# Altium PCB Voltage_Follower_PCB.PcbDoc
Units mil, origin at the board's own origin, x right, y up, seen from the top; angles counter-clockwise.
Board outline 2835 x 2210 mil, 2 copper layers (Top Layer, Bottom Layer); 24 components, 16 nets, 76 pads, 0 vias.
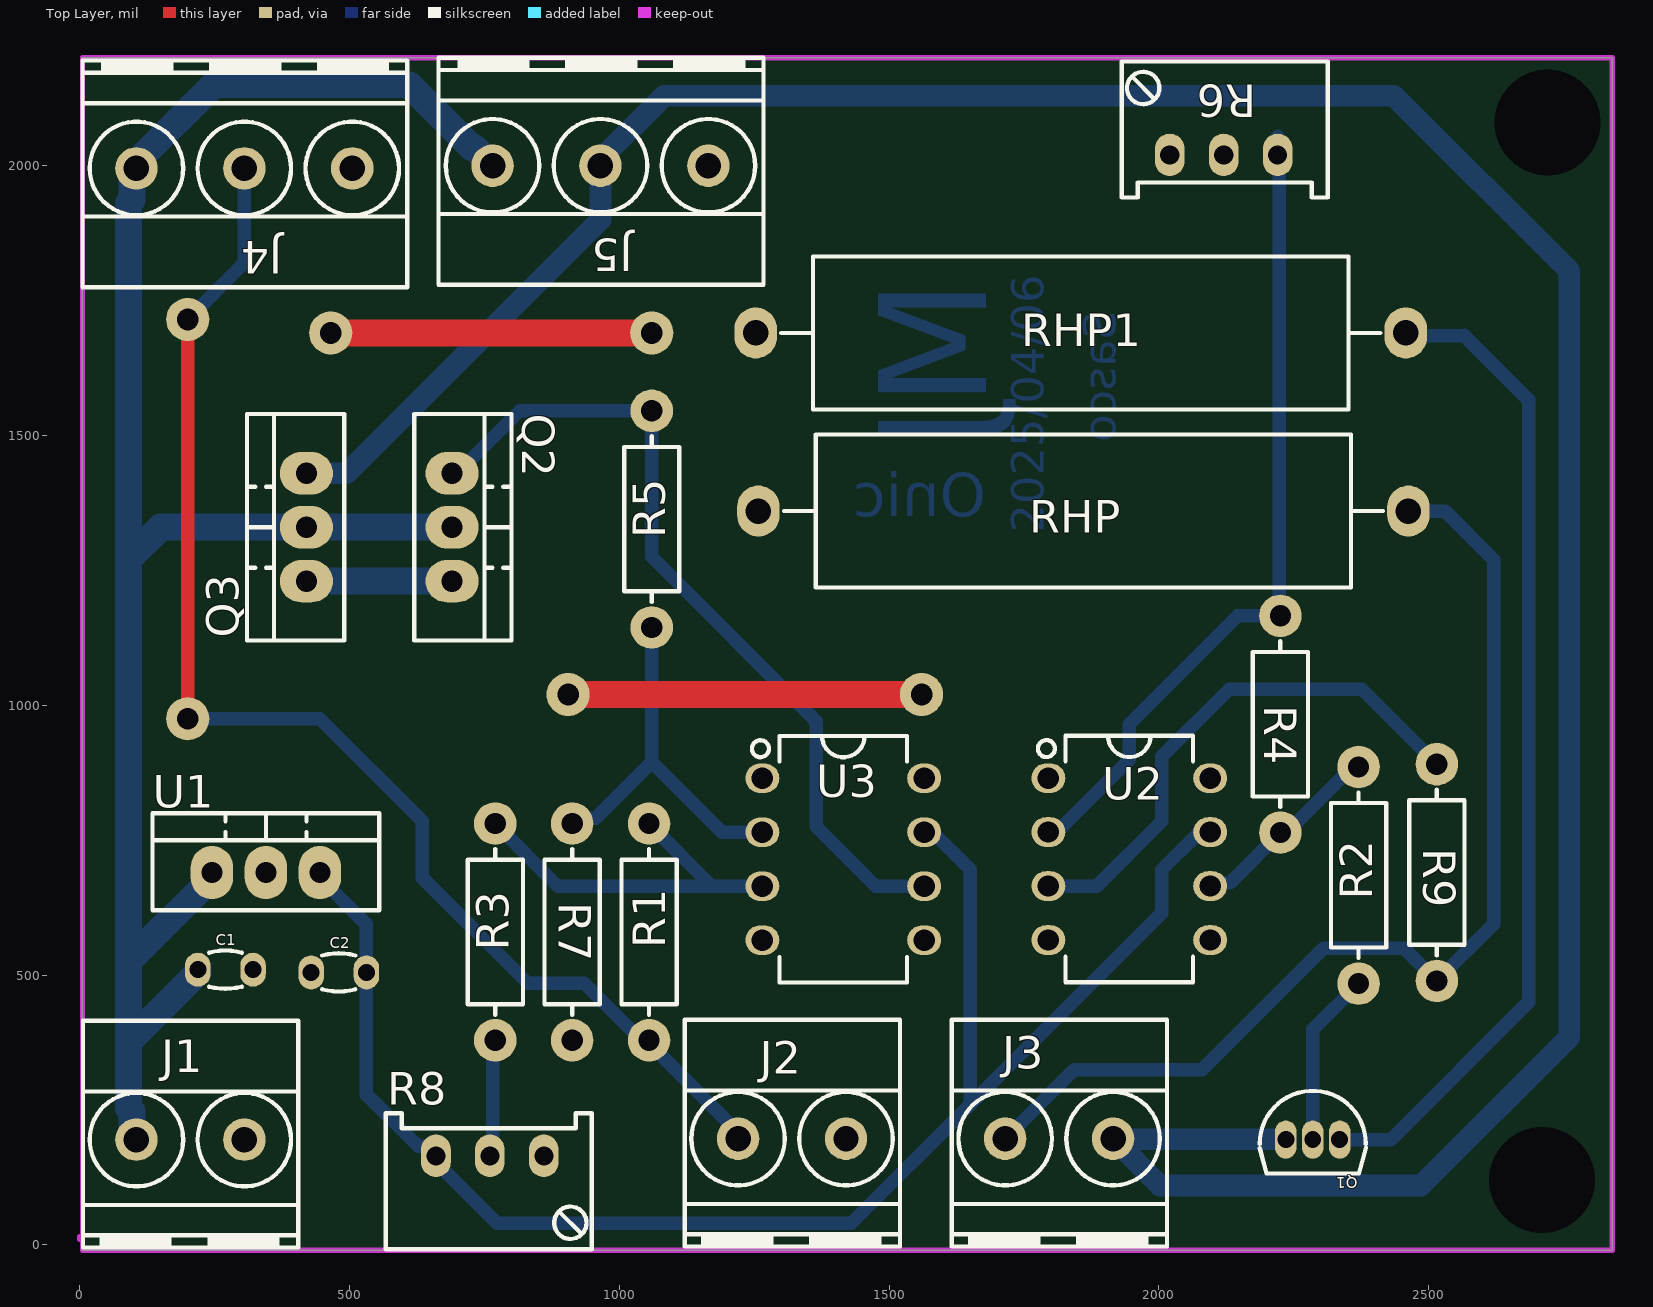
[diagram p0: Top Layer view]
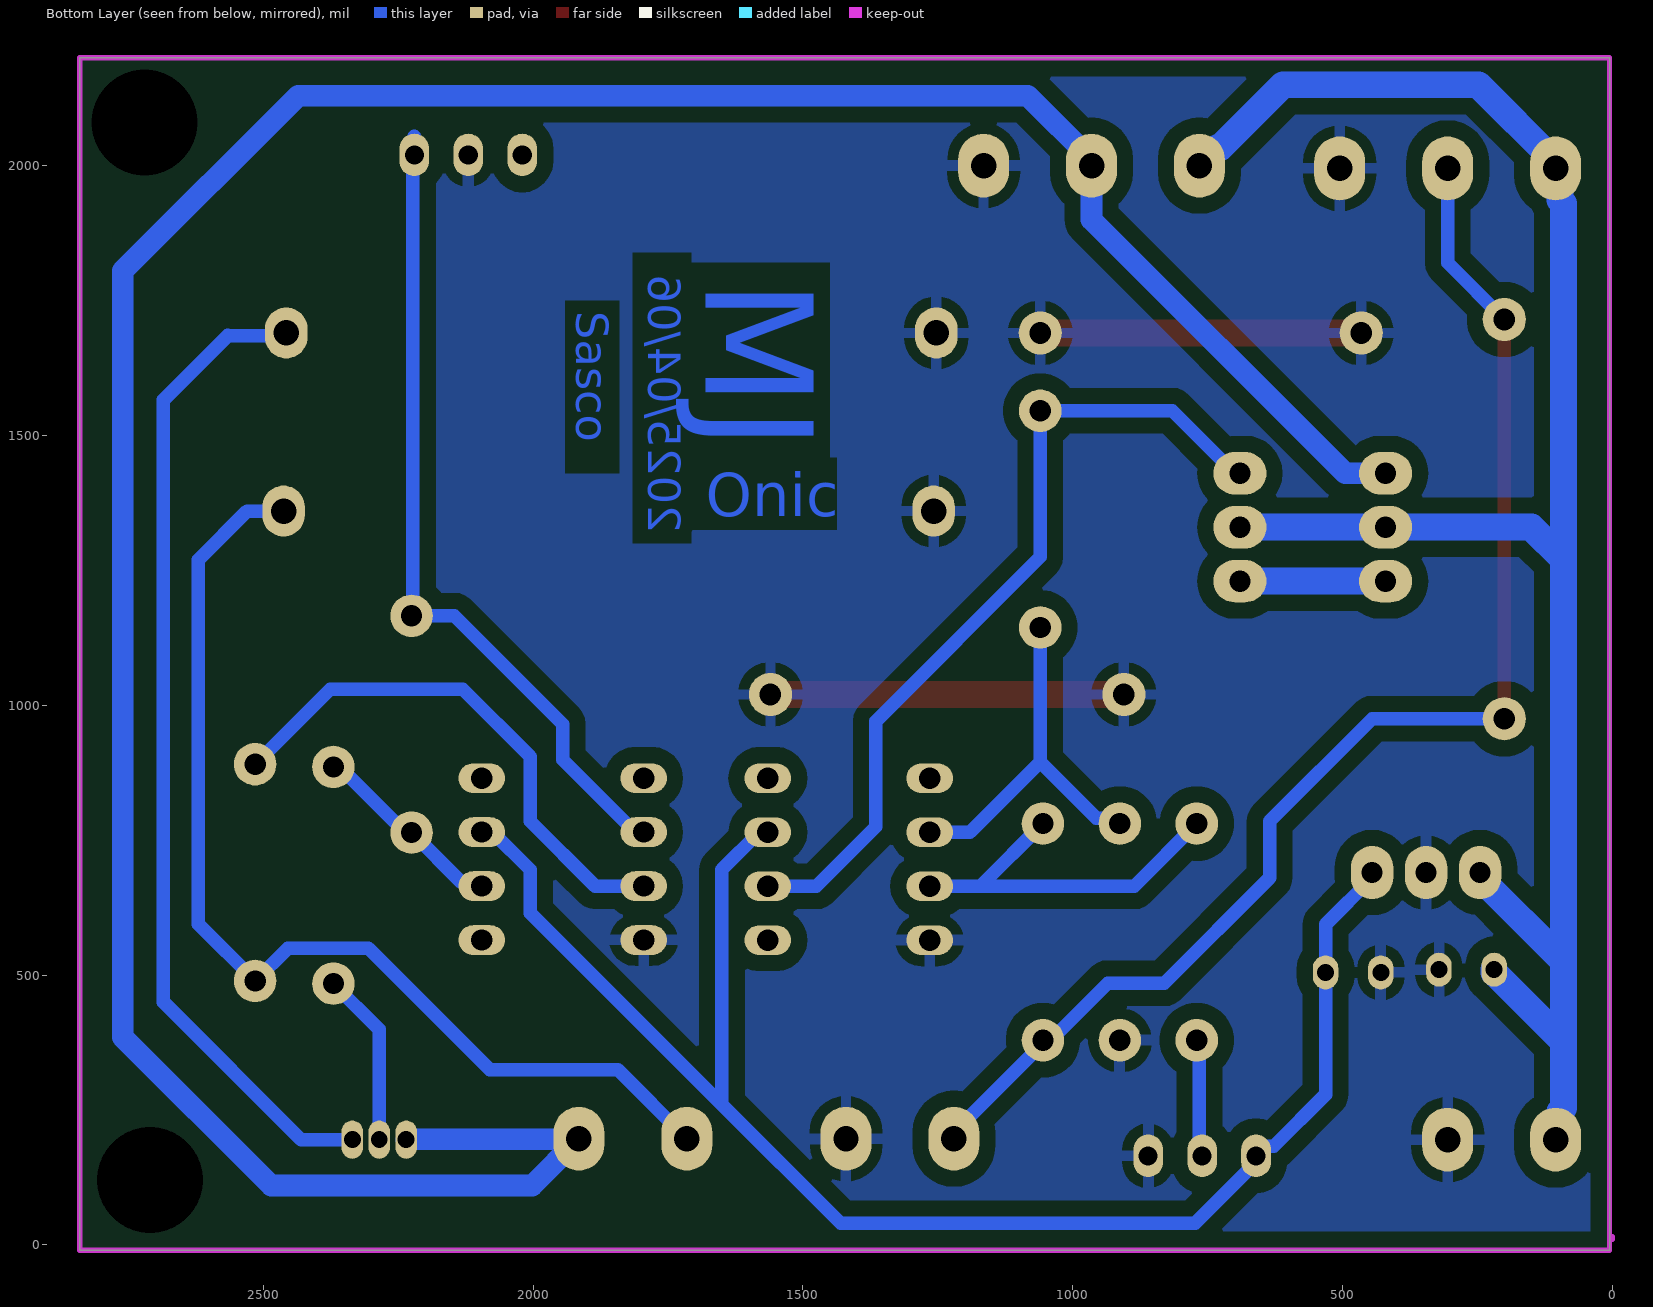
[diagram p1: Bottom Layer view, seen from below]
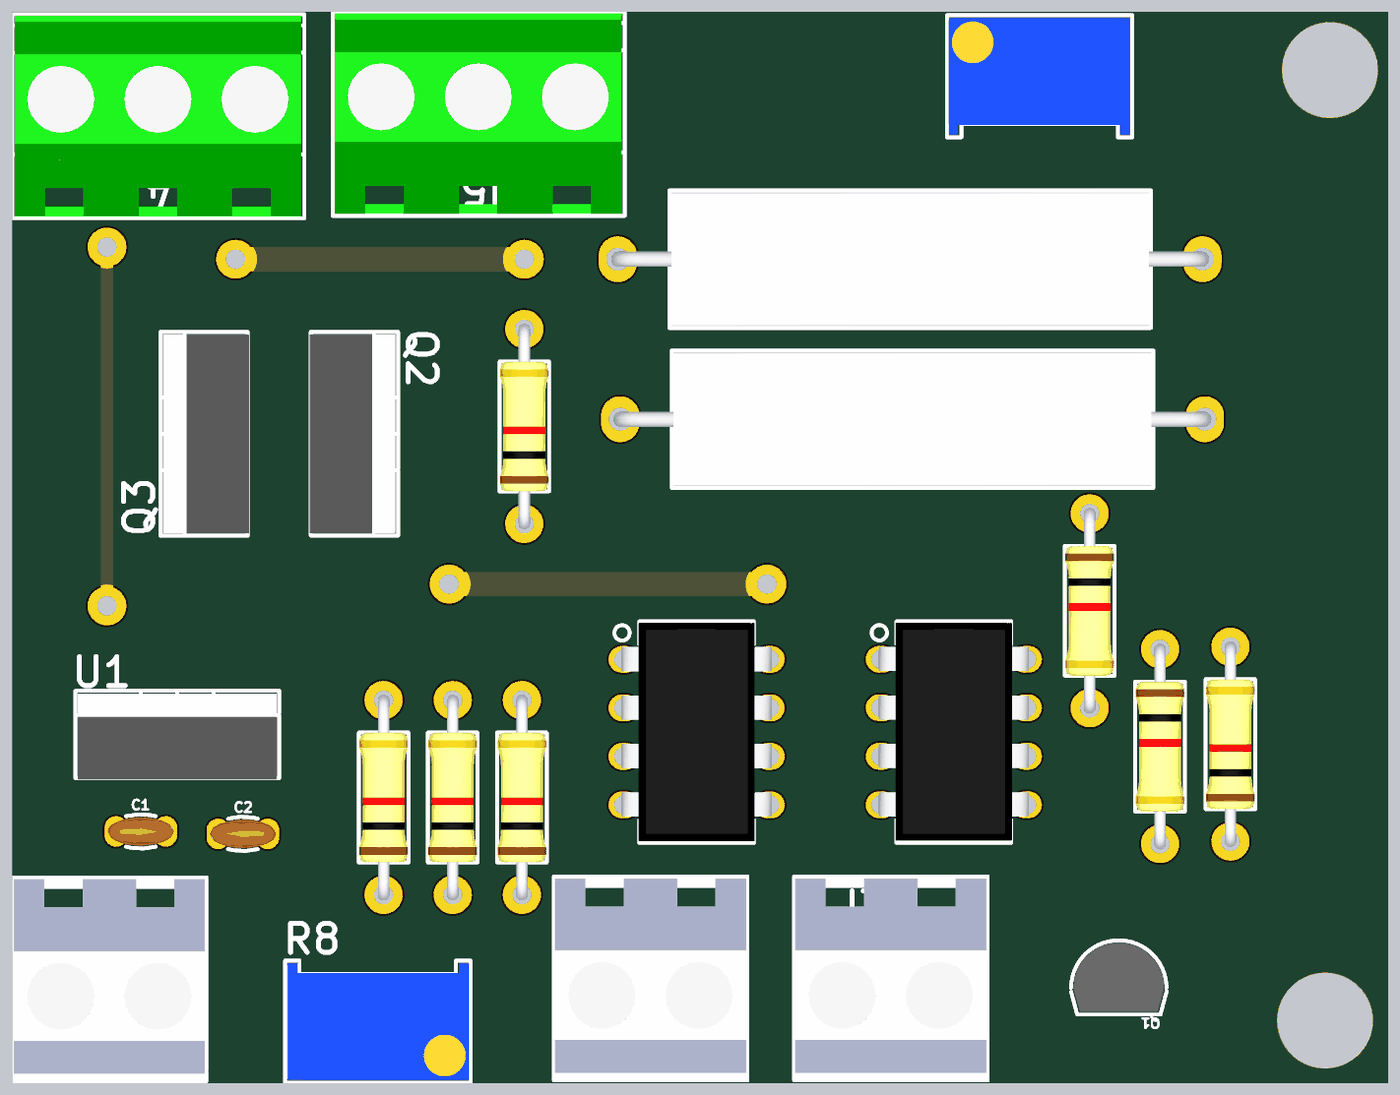
[diagram p2: 3D render of the assembled board from above, using the file's embedded part models]

## Layer stack, top to bottom
Top Solder: solder mask 0.4, Solder Resist, Dk 3.5
Top Layer: signal copper 1.4
Dielectric 1: dielectric 12.6, FR-4, Dk 4.8
Bottom Layer: signal copper 1.4
Bottom Solder: solder mask 0.4, Solder Resist, Dk 3.5

## Board outline
5,-10 5,2200 2840,2200 2840,-10

## Design rules (kind name [scope] priority, off if disabled: settings)
Clearance [All] p1: gap=10 ignorepadtopadclearanceinfootprint=TRUE except(20: Fill-Fill Fill-Poly Fill-Region Poly-Poly Poly-Region Region-Region; 30: Arc-Fill Arc-Poly Arc-Region Track-Fill Track-Poly Track-Region THPad-Fill THPad-Poly THPad-Region)
PlaneConnect [All] p1: planeconnectstyle=Relief reliefexpansion=20 reliefentries=4 reliefconductorwidth=10 reliefairgap=20
PolygonConnect [All] p1: connectstyle=Relief reliefconductorwidth=20 reliefentries=4 polygonreliefangle="90 Angle" airgapwidth=20
RoutingVias [All] p1: holewidth=28 width=50 viastyle="Through Hole" minholewidth=28 minwidth=50 maxholewidth=28 maxwidth=50
SolderMaskExpansion [All] p1: expansion=4 istentingtop=FALSE
Width [All] p1: maxlimit=50 minlimit=10 preferedwidth=25 minimp=50.000000 maximp=50.000000 favimp=50.000000
29 further rules are at their usual default settings.

## Components (designator, comment, footprint, x,y, rotation, side; value= is the part's Value field where it differs from the comment)
C1 "10uF" C_CERM_D3 269.87,510 r180 top
C2 "10uF" C_CERM_D3 480.13,505 r0 top
J1 "CONN_TB2" TBG_2 205,195 r180 top
J2 "CONN_TB2" TBG_2 1320,196.77 r180 top
J3 "CONN_TB2" TBG_2 1815,196.77 r180 top
J4 "CONN_TB3" TBG_3 305,1995 r0 top
J5 "CONN_TB3" TBG_3 965,2000 r0 top
Q1 "BC548" TO92_3 2285,195 r0 top
Q2 "TIP41" TO220_3 689.99,1330 r270 top
Q3 "TIP41" TO220_3 419.99,1330 r90 top
R1 "10K" R025W_AX04 1055,580 r90 top
R2 "10K" R025W_AX04 2370,685 r270 top
R3 "10K" R025W_AX04 770,580 r90 top
R4 "10K" R025W_AX04 2225,965 r270 top
R5 "10K" R025W_AX04 1060,1345 r90 top
R6 "POT10K" POT_3296W 2120,2020 r0 top
R7 "10K" R025W_AX04 912.5,580 r90 top
R8 "POT10K" POT_3296W 760,165 r180 top
R9 "10K" R025W_AX04 2515,690 r90 top
RHP "1" RWW5W 1860,1360 r0 top
RHP1 "1" RWW5W 1855,1690 r0 top
U1 "L78M15CV" TO220_3 345,690 r0 top
U2 "LM741" DIP_8 1945,715 r0 top
U3 "LM741" DIP_8 1415,714.78 r0 top

## Footprints (in the part's own frame and the unit in brackets; to place one, negate y for a bottom-side part, rotate by r counter-clockwise, add the part's x,y. Pads: shape width x height; smd on the part's side, far side on the other; paste and mask are expansions set on the pad)
C_CERM_D3 [mm] "CAP, CER MULTILAYER, D:3.5mm, pitch: 2.54mm"
  oval 1.2x1.6 hole 0.8: 1(-1.3,0) 2(1.3,0)
  silkscreen extent -0.78,-0.9 0.78,0.9, body extent -1.75,-0.75 1.75,0.75, height 4
DIP_8 [mm] "DIP, pitch 2.54mm, 300mil Width"
  oval 1.6x1.4 / inner round 1.4 / far side oval 2.2x1.4 hole 1: 1(-3.81,3.81) 2(-3.81,1.27) 3(-3.81,-1.27) 4(-3.81,-3.81) 5(3.81,-3.81) 6(3.81,-1.27) 7(3.81,1.27) 8(3.81,3.81)
  silkscreen extent -4.3,-5.8 3,5.8, body extent -3.94,-5.7 3.94,5.73, height 4.19
POT_3296W [mm] "POT, TRIM, 10.0X5.0mm, pitch: 2.5mm 3299W 3296W S64W"
  oval 1.4x2 / inner round 1.2 / far side oval 1.4x2 hole 0.9: 1(-2.54,0) 2(0,0) 3(2.54,0)
  silkscreen extent -4.8,-2 4.9,4.4, body extent -4.73,-1.85 4.8,4.25, height 11.56
R025W_AX04 [mm] "RESISTOR 1/4 WATT, AXIAL0.4"
  round 2 hole 1: 1(-5.1,0) 2(5.1,0)
  silkscreen extent -3.9,-1.3 3.9,1.3, body extent -5.38,-1.28 5.38,1.28, height 2.6
RWW5W [mm] "RESISTOR 5 WATT, Ceramic Wirewound"
  oval 2x2.4 hole 1.2: 1(-15.3,0) 2(15.3,0)
  silkscreen extent -14.1,-3.6 14.1,3.6, body extent -15.64,-3.5 15.64,3.5, height 8.35
TBG_2 [mm] "Terminal Block Green"
  round 2 / inner round 2 / far side oval 2.4x3 hole 1.2: 1(-2.54,0) 2(2.54,0)
  silkscreen extent -5.08,-5.6 5.05,5.08, body extent -5,-5.5 5,5, height 14
TBG_3 [mm] "Terminal Block Green"
  round 2 / inner round 2 / far side oval 2.4x3 hole 1.2: 1(-5.08,0) 2(0,0) 3(5.08,0)
  silkscreen extent -7.62,-5.6 7.67,5.08, body extent -7.5,-5.5 7.5,5, height 14.1
TO92_3 [mm] "TO-92, SOT54"
  oval 1x1.8 hole 0.8 mask+0.1: 1(-1.27,0) 2(0,0) 3(1.27,0)
  silkscreen extent -2.5,-1.59 2.5,2.3, body extent -2.38,-1.45 2.38,2.18, height 7.82
TO220_3 [mm] "TO-220 3 LEAD, TO-262, pitch: 2.54mm  10x4.5mm"
  oval 2x2.5 hole 1: 1(-2.54,0) 2(0,0) 3(2.54,0)
  silkscreen extent -5.33,-1.78 5.33,2.79, body extent -5.2,-1.85 5.2,2.65, height 19

## Part data
C1 C2: library part CAP_THD_CER, "CAP, THD, CER MULTI LAYER,", ASSEMBLY=ASSEMBLY, DESC="CAP, CER MULTI LAYER,", MANF=MANF, MANF_P#=MANF_PART#, PARAM2=50V, PRICE="100= 1$"
J1 J2 J3 J4 J5: "CONN, TERMINAL BLOCK, 5.08mm pitch"
Q1: library part NPN_BC548_TO92, "BJT, NPN, 30v, 0.1A, THD, TO92", MANF=FAIRCHILD, MANF_P#=BC548, PARAM="30v, 0.1A", PARAM2=500mW
Q2 Q3: library part NPN_TIP41_TO220, "BJT, NPN, 60v, 6A, THD, TO-220", MANF=ON, MANF_P#="TIP41A, TIP41B, TIP41C", PARAM="60-100v, 6A", PARAM2=65W
R1 R2 R3 R4 R5 R7 R9 RHP RHP1: library part RES_THD, "RESISTOR, THD", ASSEMBLY=ASSEMBLY, DESC=DESCRIPTION, DIST#=MOUSER, MANF="KOA SPEER", MANF_P#=RK73H1ETTP4701F, PARAM=0.063W, PARAM2=1%, PRICE="100= 0.5$"
R6 R8: library part RES_THD_POT_3296W, "RESISTOR, THD, Potentiometer"
U1: library part VREG_78M15_TO220, "REG, Linear, Fixed, 15v, 1.5A, TO220", MANF=ST, MANF_P#=L78M15CV, PARAM="15v, 1.5A", PARAM2=PARAM2
U2 U3: library part LM741_DIP8, "AMP, General-Purpose", MANF="Texas Instruments", MANF_P#=LM741CN

## Free pads (board coordinates)
  round 60 hole 196.85: 2(2720,2080) 3(2710,120)
  round 80 hole 40: 4(200,1715) 5(200,975) 6(465,1690) 7(1060,1690) 8(905,1020) 9(1560,1020)

## Nets (pads, with @x,y where several pads share a name; then routed paths per layer and width w, separated by ;. In a path a pad name is that pad's centre, name@x,y a point inside that pad or via, vN(x,y) a via of type N, cw(c..) or ccw(c..) an arc to the next point about the centre after c; other vN are vias at no path point)
DA: J2.2 J4.2 pad.4 pad.5 R1.1 | length 2462.2
  Top Layer w25: pad.5 pad.4
  Bottom Layer w25: pad.5 445,975 635,785 635,680 830,485 935,485 1040.79,379.21 R1.1 ; pad.4 305,1820 J4.2 ; R1.1@1061.87,366.71 1220,208.58 J2.2
G_DA: C1.1 C2.1 J1.1 J2.1 J4.3 J5.3 pad.6 pad.7 pad.8 pad.9 R6.2 R7.1 R8.1 RHP1.1 RHP.1 U1.2 U2.4 U3.4 | length 1250
  Top Layer w50: pad.6 pad.7 ; pad.8 pad.9
NetQ1_2: Q1.2 R2.2 | length 324.4
  Bottom Layer w25: Q1.2 2285,399.21 R2.2
NetQ1_3: Q1.3 RHP1.2 | length 1848.9
  Bottom Layer w25: Q1.3 2430,195 2685,450 2685,1565.92 2565.46,1685.46 2565,1685 RHP1.2@2457.36,1685
NetQ2_3: Q2.3 Q3.1 | length 270
  Bottom Layer w50: Q3.1 Q2.3
NetR1_2: R1.2 R3.2 U3.3 | length 707.1
  Bottom Layer w25: R3.2 886.01,664.78 1171.01,664.78 ; R1.2 1171.01,664.78 ; U3.3 1171.01,664.78
NetR2_1: R2.1 R4.2 U2.6 | length 366.5
  Bottom Layer w25: U2.6 2100.76,670.76 2131.55,670.76 R4.2 2236.71,764.21 2358.29,885.79 R2.1
NetR4_1: R4.1 R6.3 U2.2 | length 1525.8
  Bottom Layer w25: U2.2 1810.75,765 1945,899.25 1945,965 2145.79,1165.79 R4.1 2222.5,1168.29 2222.5,2017.5 R6.3 R6.3@2220,2055
NetR5_1: R5.1 R7.2 U3.2 | length 703
  Bottom Layer w25: R7.2 922.78,791.07 956.07,791.07 1060,895 ; R5.1 1060,895 ; U3.2 1190.22,764.78 1060,895
NetR9_2: R9.2 U2.3 | length 999.1
  Bottom Layer w25: U2.3 1885,665 2005,785 2005,905 2130,1030 2375.79,1030 R9.2
V15: C2.2 R8.3 U1.3 U2.7 U3.7 | length 3015.1
  Bottom Layer w25: U1.3 445,680.16 531.32,593.84 C2.2 531.32,278.68 627.43,182.57 646.09,182.57 660,168.66 660,153.19 773.19,40 1430,40 1650,260 ; U3.7 1580.75,764.78 1650,695.53 1650,260 ; U2.7 2075,765 2005,695 2005,615 1650,260
V24: C1.2 J1.2 J4.1 J5.1 Q2.2 Q3.2 U1.1 | length 3644.5
  Bottom Layer w50: J1.2 96.49,203.51 96.49,246.78 90,253.27 90,376.2 ; C1.2 218.68,504.88 90,376.2 ; U1.1 245,680.16 90,525.16 ; Q2.2 Q3.2 150,1330 90,1270 ; J5.1@760,2000 760,2004.77 730.72,2034.06 725.94,2034.06 610,2150 248.19,2150 105,2006.81 J4.1 96.49,1986.49 96.49,1936.49 90,1930 90,1270 ; 90,376.2 90,525.16 ; 90,525.16 90,1270
VCalib: R3.1 R8.2 | length 218.4
  Bottom Layer w25: R8.2 765,170 765,374.21 R3.1
VFollow: Q2.1 R5.2 U3.6 | length 1560.7
  Bottom Layer w25: Q2.1 699.83,1430 815.62,1545.79 R5.2 1060,1275 1365,970 1365,775 1475.22,664.78 U3.6
Vload: J3.1 J5.2 Q1.1 Q3.3 | length 5564.4
  Bottom Layer w40: Q3.3 495,1430 965,1900 J5.2 965,2011.81 1083.19,2130 2435,2130 2760,1805 2760,385 2485,110 2001.77,110 J3.1@1915.89,195.89 ; J3.1 J3.1@1915.89,195.89 ; Q1.1 2234.11,195.89 J3.1@1915.89,195.89
VSens: J3.2 R9.1 RHP.2 | length 1990.7
  Bottom Layer w25: J3.2 1843.23,325 2080,325 2305,550 2454.21,550 R9.1 2620,594.21 2620,1270 2530,1360 RHP.2
pads on no net: R6.1 U2.1 U2.5 U2.8 U3.1 U3.5 U3.8

## Polygon pours and split planes (outlines as drawn)
G_DA on Bottom Layer "G_DA_L02_P000" (solid, remove dead copper, pour order 0): 0,0 10,-10 2840,-10 2840,2195 2830,2205 5,2205

## Keep-outs
Keep-Out Layer:
  lines w10: 0,10 5,10 5,15 0,15 0,10 ; 5,-10 2840,-10 2840,2200 5,2200 5,-10

## Other copper
Bottom Layer:
  text "MJ" at 1680,1790 h200 r90
  text "Sasco" at 1920,1730 h60 r90
  text "Onic" at 1680,1350 h80
  text "2025/04/06" at 1786.43,1320 h60 r90